# EAGLE board motherboard (EAGLE 8.5.0)
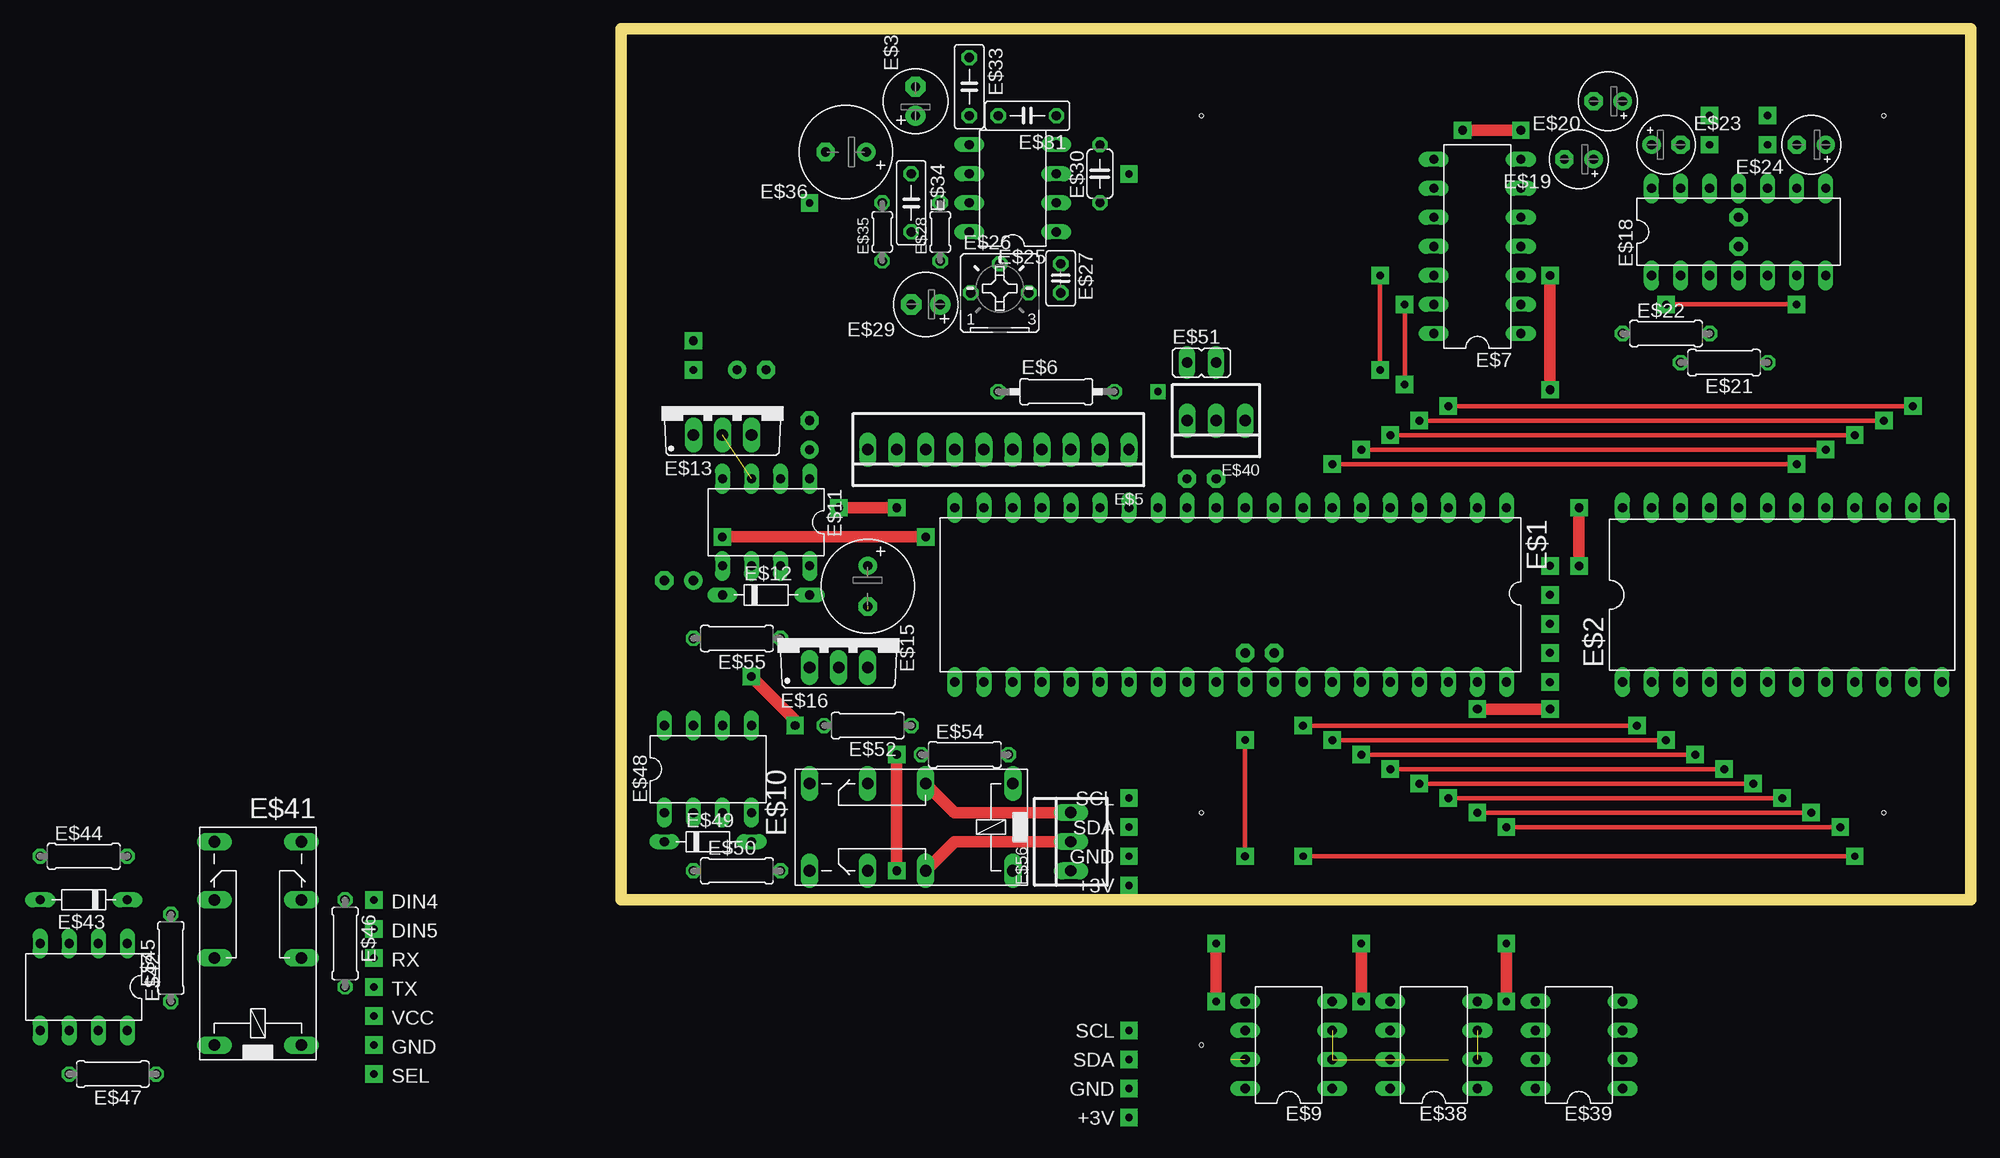
[diagram p0: board, top side]
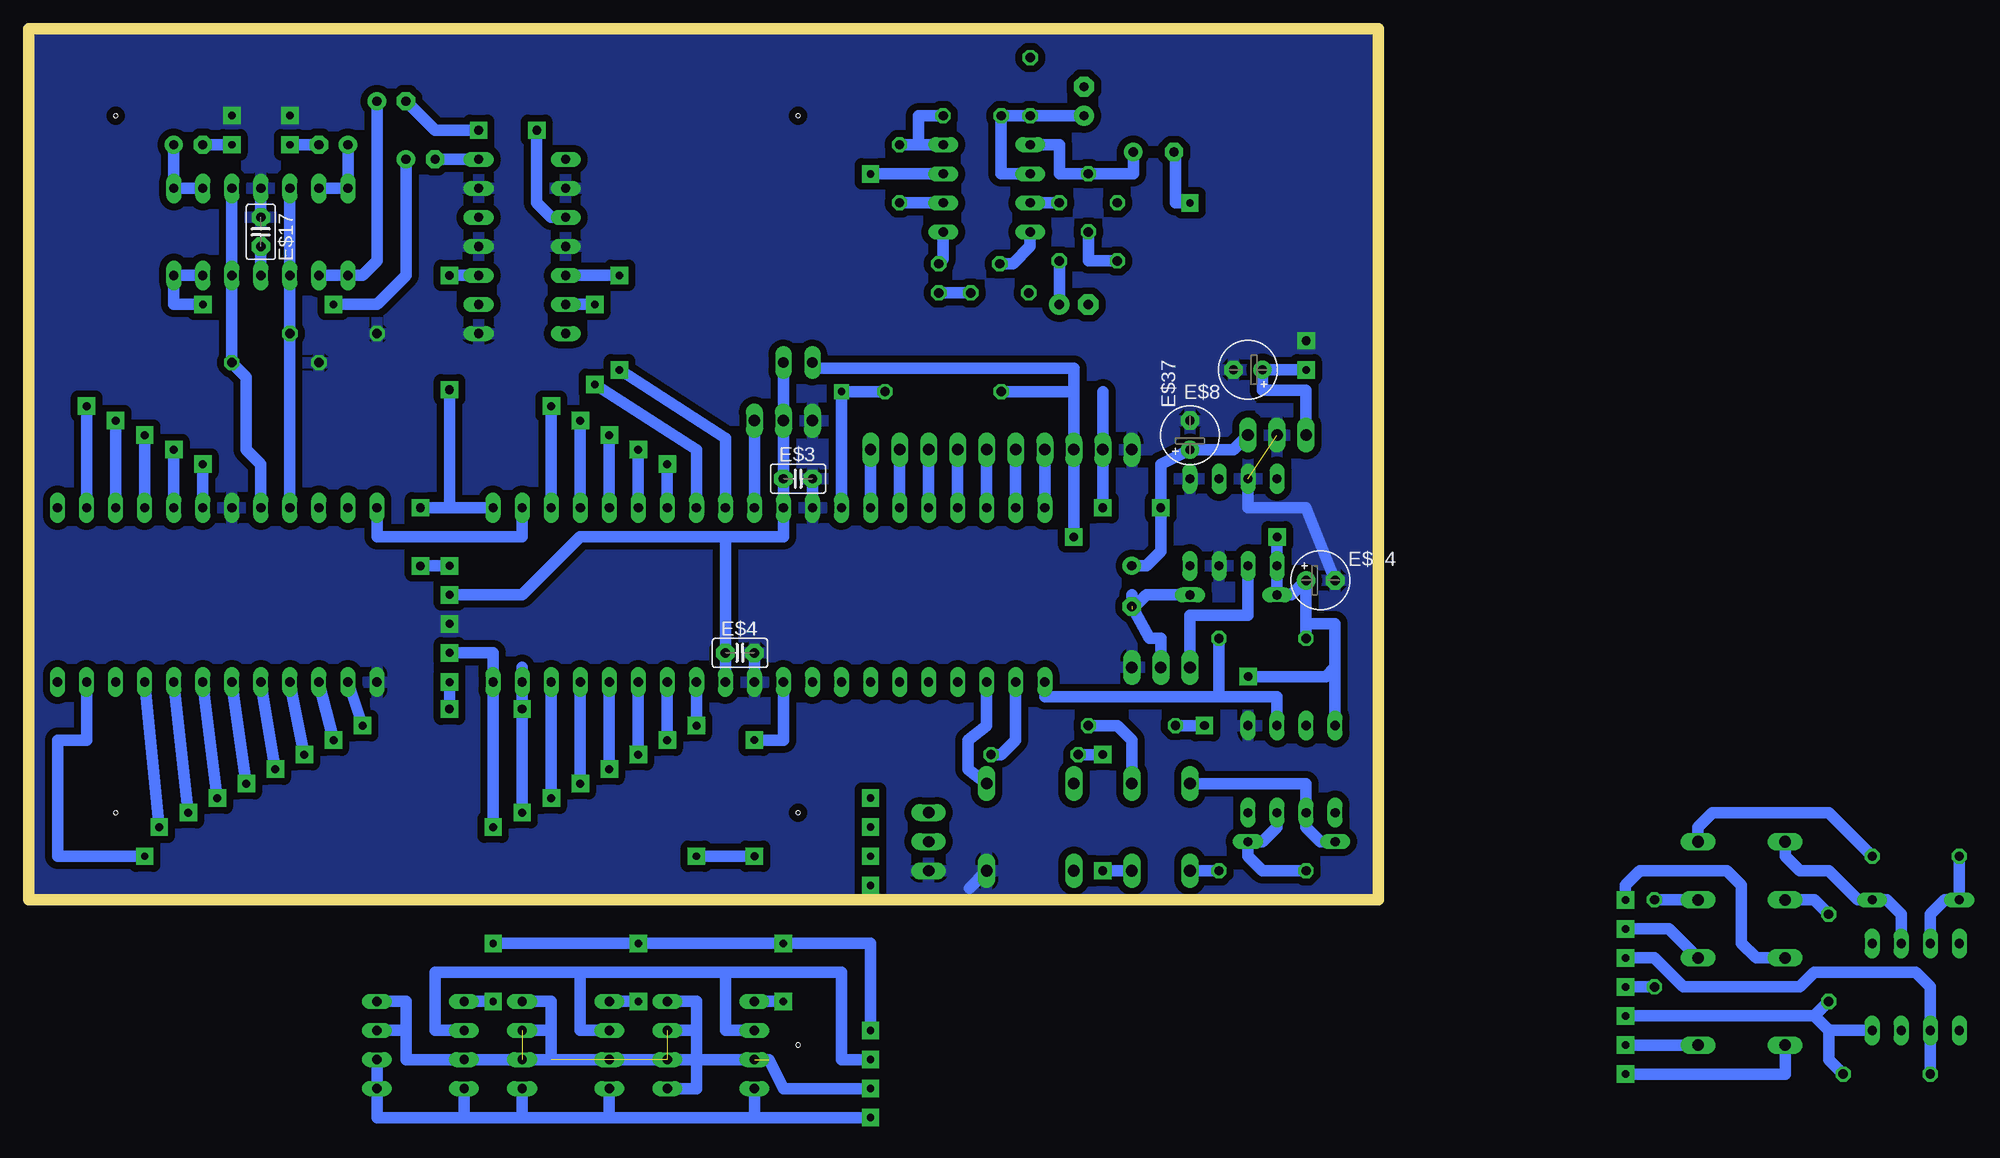
[diagram p1: board, bottom side, seen from below]

Size 118.11 x 76.2 mm. Coordinates in mm from the lower left corner, seen from the top.
Outline: 118.11,0 0,0 0,76.2 118.11,76.2 118.11,0
Copper layers (1*16): Top 0.035mm / dielectric 1.5mm / Bottom 0.035mm
Design rules "default *": minimum track width 6mil, minimum drill 0.35mm, track to track 6mil, track to pad 6mil, pad to pad 6mil, via to via 6mil, smd to smd 6mil, copper to edge 0mil, drill to drill 6mil, minimum pad ring 10mil, minimum via ring 8mil, stop-mask expansion 4mil, vias tented up to drill 0mil, thermal gap 10mil
Holes 0.35 mm at 110.49,7.62 50.8,7.62 110.49,68.58 50.8,68.58 50.8,-12.7

## Footprints (pad centres in the part's own frame; a part is rotated, then mirrored left to right if it is on the bottom)
DIL40 = drill 0.813 long: 1 -24.13,-7.62; 2 -21.59,-7.62; 3 -19.05,-7.62; 4 -16.51,-7.62; 5 -13.97,-7.62; 6 -11.43,-7.62; 7 -8.89,-7.62; 8 -6.35,-7.62; 9 -3.81,-7.62; 10 -1.27,-7.62; 11 1.27,-7.62; 12 3.81,-7.62; 13 6.35,-7.62; 14 8.89,-7.62; 15 11.43,-7.62; 16 13.97,-7.62; 17 16.51,-7.62; 18 19.05,-7.62; 19 21.59,-7.62; 20 24.13,-7.62; 21 24.13,7.62; 22 21.59,7.62; 23 19.05,7.62; 24 16.51,7.62; 25 13.97,7.62; 26 11.43,7.62; 27 8.89,7.62; 28 6.35,7.62; 29 3.81,7.62; 30 1.27,7.62; 31 -1.27,7.62; 32 -3.81,7.62; 33 -6.35,7.62; 34 -8.89,7.62; 35 -11.43,7.62; 36 -13.97,7.62; 37 -16.51,7.62; 38 -19.05,7.62; 39 -21.59,7.62; 40 -24.13,7.62
DIL24-6 = drill 0.813 long: 1 -13.97,-7.62; 2 -11.43,-7.62; 3 -8.89,-7.62; 4 -6.35,-7.62; 5 -3.81,-7.62; 6 -1.27,-7.62; 7 1.27,-7.62; 8 3.81,-7.62; 9 6.35,-7.62; 10 8.89,-7.62; 11 11.43,-7.62; 12 13.97,-7.62; 13 13.97,7.62; 14 11.43,7.62; 15 8.89,7.62; 16 6.35,7.62; 17 3.81,7.62; 18 1.27,7.62; 19 -1.27,7.62; 20 -3.81,7.62; 21 -6.35,7.62; 22 -8.89,7.62; 23 -11.43,7.62; 24 -13.97,7.62
C2.5-2 = drill 0.813 pad 1.6 octagon: 1 -1.27,0; 2 1.27,0
22-23-2101 = drill 1 long: 1 -11.43,0; 2 -8.89,0; 3 -6.35,0; 4 -3.81,0; 5 -1.27,0; 6 1.27,0; 7 3.81,0; 8 6.35,0; 9 8.89,0; 10 11.43,0
0207/10 = drill 0.813 octagon: 1 -5.08,0; 2 5.08,0
DIL14 = drill 0.813 long: 1 -7.62,-3.81; 2 -5.08,-3.81; 3 -2.54,-3.81; 4 0,-3.81; 5 2.54,-3.81; 6 5.08,-3.81; 7 7.62,-3.81; 8 7.62,3.81; 9 5.08,3.81; 10 2.54,3.81; 11 0,3.81; 12 -2.54,3.81; 13 -5.08,3.81; 14 -7.62,3.81
E2,5-5 = drill 0.813 pad 1.6: + -1.27,0 | drill 0.813 pad 1.6 octagon: - 1.27,0
DIL08 = drill 0.813 long: 1 -3.81,-3.81; 2 -1.27,-3.81; 3 1.27,-3.81; 4 3.81,-3.81; 5 3.81,3.81; 6 1.27,3.81; 7 -1.27,3.81; 8 -3.81,3.81
351 = drill 1.016 long: 1 -3.81,-3.81; 16 -3.81,3.81; O1 8.89,-3.81; O2 8.89,3.81; P1 3.81,-3.81; P2 3.81,3.81; S1 13.97,-3.81; S2 13.97,3.81
D-7.5 = drill 0.813 long: A 3.81,0; C -3.81,0
TO220V = drill 1.016 long: 1 -2.54,-2.54; 2 0,-2.54; 3 2.54,-2.54
E3,5-8 = drill 0.813 pad 1.6: + -1.778,0 | drill 0.813 pad 1.6 octagon: - 1.778,0
0207/7 = drill 0.813 octagon: 1 -3.81,0; 2 3.81,0
B25P = drill 0.813 octagon: A -2.54,0; E 2.54,0; S 0,2.54
C025-025X050 = drill 0.813 octagon: 1 -1.27,0; 2 1.27,0
0204/5 = drill 0.813 octagon: 1 -2.54,0; 2 2.54,0
E2,5-6 = drill 0.813 pad 1.778: + -1.27,0 | drill 0.813 pad 1.778 octagon: - 1.27,0
C050-024X044 = drill 0.813 octagon: 1 -2.54,0; 2 2.54,0
C050-025X075 = drill 0.813 octagon: 1 -2.54,0; 2 2.54,0
22-23-2031 = drill 1 long: 1 -2.54,0; 2 0,0; 3 2.54,0
JP1 = drill 0.914 long: 1 0,-1.27; 2 0,1.27

## Placement (x,y rotation side)
E$1  [DIL40]  53.34,26.67 180 top
E$2  [DIL24-6]  101.6,26.67 0 top
E$3  [C2.5-2]  50.8,36.83 0 bottom
E$4  [C2.5-2]  55.88,21.59 0 bottom
E$5  [22-23-2101]  33.02,39.37 180 top
E$6  [0207/10]  38.1,44.45 0 top
E$7  [DIL14]  74.93,57.15 90 top
E$8  [E2,5-5]  11.43,46.36 180 bottom
E$9  [DIL08]  58.42,-12.7 90 top  (outside the outline)
E$10  [351]  30.48,6.35 180 top
E$11  [DIL08]  12.7,33.02 180 top
E$12  [D-7.5]  12.7,26.67 0 top
E$13  [TO220V]  8.89,43.18 0 top
E$14  [E2,5-5]  5.08,27.94 0 bottom
E$15  [E3,5-8]  21.59,27.43 270 top
E$16  [TO220V]  19.05,22.86 0 top
E$17  [C2.5-2]  97.79,58.42 270 bottom
E$18  [DIL14]  97.79,58.42 0 top
E$19  [E2,5-5]  83.82,64.77 180 top
E$20  [E2,5-5]  86.36,69.85 180 top
E$21  [0207/7]  96.52,46.99 180 top
E$22  [0207/7]  91.44,49.53 0 top
E$23  [E2,5-5]  91.44,66.04 0 top
E$24  [E2,5-5]  104.14,66.04 180 top
E$25  [DIL08]  34.29,62.23 90 top
E$26  [B25P]  33.15,53.09 0 top
E$27  [C025-025X050]  38.48,54.36 270 top
E$28  [0204/5]  27.94,58.42 90 top
E$29  [E2,5-6]  26.67,52.07 180 top
E$30  [C050-024X044]  41.91,63.5 90 top
E$31  [C050-025X075]  35.56,68.58 180 top
E$32  [E2,5-6]  25.78,69.85 90 top
E$33  [C050-025X075]  30.48,71.12 270 top
E$34  [C050-025X075]  25.4,60.96 270 top
E$35  [0204/5]  22.86,58.42 90 top
E$36  [E3,5-8]  19.69,65.4 180 top
E$37  [E2,5-5]  16.51,40.64 90 bottom
E$38  [DIL08]  71.12,-12.7 90 top  (outside the outline)
E$39  [DIL08]  83.82,-12.7 90 top  (outside the outline)
E$40  [22-23-2031]  52.07,41.91 180 top
E$41  [351]  -31.75,-8.89 90 top  (outside the outline)
E$42  [DIL08]  -46.99,-7.62 180 top  (outside the outline)
E$43  [D-7.5]  -46.99,0 180 top  (outside the outline)
E$44  [0207/7]  -46.99,3.81 0 top  (outside the outline)
E$45  [0207/7]  -39.37,-5.08 90 top  (outside the outline)
E$46  [0207/7]  -24.13,-3.81 270 top  (outside the outline)
E$47  [0207/7]  -44.45,-15.24 180 top  (outside the outline)
E$48  [DIL08]  7.62,11.43 0 top
E$49  [D-7.5]  7.62,5.08 0 top
E$50  [0207/7]  10.16,2.54 0 top
E$51  [JP1]  50.8,46.99 270 top
E$52  [0207/7]  21.59,15.24 180 top
E$54  [0207/7]  30.1,12.7 0 top
E$55  [0207/7]  10.16,22.86 180 top
E$56  [22-23-2031]  39.37,5.08 90 top

## Library data of the parts
E$1 E$2 = ic-package
E$3 E$4 E$17 = capacitor-wima
E$5 E$40 E$56 = con-molex
E$6 E$21 E$22 E$27 E$28 E$30 E$31 E$33-E$35 E$44-E$47 E$50 E$52 E$54 E$55 = BeagleBone_Black_Wireless
E$7 E$9 E$11 E$18 E$25 E$38 E$39 = 40xx
E$8 E$14 E$15 E$19 E$20 E$23 E$24 E$29 E$32 E$36 E$37 = BeagleBone_Blue_R3
E$10 E$41 = relay
E$12 E$43 E$49 = diode
E$13 E$16 = transistor-pnp
E$26 = pot
E$42 E$48 = 74xx-eu
E$51 = jumper

## Nets
+3V: E$5.9 E$13.3 E$15.+ E$37.+
+5V: E$5.8 E$6.1 E$11.5 E$12.C E$14.+ E$48.8 E$51.1 E$52.2 E$55.2
+5V_JMP: E$1.11 E$1.32 E$3.1 E$40.2 E$51.2
GND [gnd]: E$1.12 E$1.31 E$2.1 E$2.19 E$3.2 E$4.2 E$5.10 E$7.1 E$7.4 E$7.6 E$7.9 E$7.11 E$8.- E$10.16 E$11.1 E$11.3 E$11.7 E$13.2 E$14.- E$16.3 E$17.1 E$18.11 E$21.2 E$22.1 E$37.- E$40.3 E$48.5 E$56.1
S$1: E$7.10 E$20.-
S$2: E$9.8 E$38.1 E$38.8 E$39.1 E$39.2 E$39.8
S$4: E$39.6
S$5: E$38.6
S$6: E$9.6
S$7: E$1.39 E$2.8
S$8: E$1.40 E$2.9
S$9: E$1.33 E$2.2
S$10: E$1.34 E$2.3
S$11: E$1.35 E$2.4
S$12: E$1.36 E$2.5
S$13: E$1.37 E$2.6
S$14: E$1.38 E$2.7
S$15: E$1.14 E$5.1
S$19: E$1.3 E$2.14
S$20: E$1.2 E$2.24
S$22: E$9.5 E$38.5 E$39.5
S$26: E$1.4 E$2.15
S$27: E$1.5 E$2.16
S$28: E$1.6 E$2.17
S$29: E$1.7 E$2.18
S$30: E$1.10 E$40.1
S$32: E$41.1
S$34: E$41.16
S$35: E$41.O2 E$45.2
S$36: E$1.15 E$5.2
S$37: E$1.16 E$5.3
S$38: E$1.17 E$5.4
S$39: E$1.18 E$5.5
S$40: E$1.19 E$5.6
S$41: E$1.20 E$5.7
S$42: E$1.13 E$6.2
S$43: E$1.21 E$48.6 E$55.1
S$44: E$42.8 E$45.1 E$47.1
S$45: E$41.O1 E$46.1
S$46: E$46.2
S$47: E$41.S2 E$42.2 E$43.C
S$49: E$48.3 E$49.A E$50.1
S$50: E$42.3 E$43.A E$44.1
S$52: E$10.S1 E$48.2 E$49.C
S$53: E$1.22 E$54.2
S$55: E$1.30 E$2.11
S$56: E$10.S2 E$50.2
S$57: E$41.S1 E$44.2
S$59: E$10.O2 E$54.1
S$60: E$41.P1
S$61: E$41.P2
S$63 [gnd]: E$12.A E$15.- E$16.2
S$64: E$42.6 E$47.2
S$65: E$1.23 E$10.1
S$66: E$10.P1 E$56.3
S$67: E$10.P2 E$56.2
S$68: E$9.1 E$9.2 E$9.3 E$9.4 E$9.7 E$38.2 E$38.3 E$38.4 E$38.7 E$39.3 E$39.4 E$39.7
S$69: E$10.O1 E$52.1
S$70: E$11.6 E$16.1
S$73: E$18.13 E$18.14 E$23.+
S$74: E$18.1 E$18.2 E$20.+
S$75: E$18.8 E$18.9 E$24.+
S$76: E$23.-
S$77: E$1.8 E$7.13
S$78: E$1.9 E$7.12
S$79: E$25.8 E$26.S
S$80: E$1.1 E$7.3
S$82: E$7.7 E$19.-
S$83: E$26.E E$27.2
S$84: E$2.21 E$18.3 E$18.12 E$22.2
S$85: E$2.20 E$18.5 E$18.10 E$21.1
S$87: E$17.2 E$18.4
S$89: E$18.6 E$18.7 E$19.+
S$90: E$24.-
S$93: E$25.7 E$28.2
S$94: E$28.1 E$29.+
S$96: E$25.4 E$30.2 E$31.1
S$97: E$25.2 E$30.1
S$98: E$25.3
S$99: E$25.5 E$34.1 E$36.+
S$100: E$25.1 E$27.1
S$101: E$25.6 E$31.2 E$32.+ E$33.2
S$102: E$34.2 E$35.1
S$104: E$8.+ E$13.1

## Tracks (layer width: path | path; a pad name or v marks a point on that pad's centre or on a via)
+3V  (via drill 0.75 pad 1.52)
  Top 1.016: v24.13,34.29 v19.05,34.29
  Bottom 1.016: E$13.3 12.7,39.37 E$37.+ 19.05,38.1 v19.05,34.29 19.05,30.48 20.32,29.21 E$15.+ | 24.13,44.45 E$5.9 v24.13,34.29
+5V  (via drill 0.75 pad 1.52)
  Top 1.016: v11.43,19.52 15.24,15.71 v15.24,15.24 | v8.89,31.75 v26.67,31.75
  Bottom 1.016: E$6.1 26.67,44.45 | 26.67,44.45 E$5.8 v26.67,31.75 | E$48.8 3.81,20.32 | 3.81,20.32 3.81,24.13 6.35,24.13 | 6.35,24.13 E$14.+ 7.62,26.67 E$12.C E$11.5 v8.89,31.75 | E$55.2 6.35,24.13 | 3.81,20.32 4.61,19.52 v11.43,19.52 | v15.24,15.24 E$52.2 | 26.67,44.45 26.67,46.48 49.53,46.48 E$51.1
+5V_JMP  (via drill 0.7 pad 1.52)
  Bottom 1.016: v81.28,26.67 74.93,26.67 69.85,31.75 57.15,31.75 | 57.15,31.75 52.07,31.75 E$1.11 E$3.1 E$40.2 E$51.2 | 57.15,31.75 E$1.32
GND  (via drill 0.65 pad 1.52, 0.7 pad 1.52, 0.75 pad 1.52)  (1 unrouted)
  Bottom 1.016: E$11.3 11.43,34.29 6.35,34.29 E$14.- | E$3.2 E$1.12 | E$1.31 E$4.2 | E$17.1 E$18.11 | E$10.16 35.81,1.02
  other vias: 6.35,48.9 81.28,24.13 95.25,68.58 100.33,68.58
  pour Bottom (isolate 0.61): 0,76.2 0,0 118.11,0 118.11,76.2
S$1  (via drill 0.75 pad 1.52)
  Top 1.016: v78.74,67.31 v73.66,67.31
  Bottom 1.016: E$20.- 82.55,67.31 v78.74,67.31 | v73.66,67.31 73.66,60.96 72.39,59.69 E$7.10
S$2  (via drill 0.65 pad 1.52)
  Bottom 1.016: v44.45,-19.05 54.61,-19.05 | 54.61,-19.05 E$9.8 | 54.61,-19.05 67.31,-19.05 | 67.31,-19.05 E$38.8 | 67.31,-19.05 74.93,-19.05 | 74.93,-19.05 80.01,-19.05 | 80.01,-19.05 E$39.8 | E$38.1 74.93,-19.05 | 80.01,-19.05 87.63,-19.05 E$39.1 E$39.2
S$3  (via drill 0.65 pad 1.52)
  other vias: 44.45,1.27
S$4  (via drill 0.65 pad 1.52)
  Bottom 1.016: E$39.6 82.55,-11.43 82.55,-6.35 46.99,-6.35 46.99,-13.97 v44.45,-13.97
S$5
  Bottom 1.016: E$38.6 69.85,-11.43 69.85,-6.35
S$6
  Bottom 1.016: E$9.6 57.15,-11.43 57.15,-6.35
S$7  (via drill 0.7 pad 1.52, 0.75 pad 1.52)
  Top 0.406: v74.93,7.62 v104.14,7.62
  Top 1.016: v81.28,16.67 v74.93,16.67
  Bottom 1.016: E$2.8 v104.14,7.62 | 74.93,20.32 E$1.39 v74.93,16.67 v74.93,7.62 | v81.28,19.05 v81.28,16.67
S$8  (via drill 0.7 pad 1.52)
  Top 0.406: v77.47,6.35 v106.68,6.35
  Bottom 1.016: v106.68,6.35 E$2.9 | v77.47,6.35 E$1.40 77.47,21.59 v81.28,21.59
S$9  (via drill 0.7 pad 1.52)
  Top 0.406: v59.69,15.24 v88.9,15.24
  Bottom 1.016: E$1.33 v59.69,15.24 | v88.9,15.24 E$2.2
S$10  (via drill 0.7 pad 1.52)
  Top 0.406: v62.23,13.97 v91.44,13.97
  Bottom 1.016: v62.23,13.97 E$1.34 | v91.44,13.97 E$2.3
S$11  (via drill 0.7 pad 1.52)
  Top 0.406: v64.77,12.7 v93.98,12.7
  Bottom 1.016: v64.77,12.7 E$1.35 | v93.98,12.7 E$2.4
S$12  (via drill 0.7 pad 1.52)
  Top 0.406: v67.31,11.43 v96.52,11.43
  Bottom 1.016: E$1.36 v67.31,11.43 | v96.52,11.43 E$2.5
S$13  (via drill 0.7 pad 1.52)
  Top 0.406: v69.85,10.16 v99.06,10.16
  Bottom 1.016: v69.85,10.16 E$1.37 | E$2.6 v99.06,10.16
S$14  (via drill 0.7 pad 1.52)
  Top 0.406: v72.39,8.89 v101.6,8.89
  Bottom 1.016: E$1.38 v72.39,8.89 | v101.6,8.89 E$2.7
S$15
  Bottom 1.016: E$1.14 E$5.1
S$16  (via drill 0.65 pad 1.52)
  other vias: 44.45,6.35
S$19  (via drill 0.7 pad 1.52)
  Top 0.406: v72.39,43.18 v113.03,43.18
  Bottom 1.016: E$1.3 v72.39,43.18 | E$2.14 v113.03,43.18
S$20
  Bottom 1.016: E$1.2 74.93,31.75 87.63,31.75 E$2.24
S$21  (via drill 0.65 pad 1.52)
  other vias: 44.45,8.89
S$22  (via drill 0.65 pad 1.52)
  Top 1.016: v52.07,-8.89 v52.07,-3.81 | v64.77,-8.89 v64.77,-3.81 | v77.47,-8.89 v77.47,-3.81
  Bottom 1.016: v44.45,-11.43 44.45,-3.81 v52.07,-3.81 v64.77,-3.81 v77.47,-3.81 | E$9.5 v52.07,-8.89 | E$38.5 v64.77,-8.89 | E$39.5 v77.47,-8.89
S$23  (via drill 0.65 pad 1.52)
  other vias: 44.45,3.81
S$26  (via drill 0.7 pad 1.52)
  Top 0.406: v69.85,41.91 v110.49,41.91
  Bottom 1.016: v69.85,41.91 E$1.4 | E$2.15 v110.49,41.91
S$27  (via drill 0.7 pad 1.52)
  Top 0.406: v67.31,40.64 v107.95,40.64
  Bottom 1.016: E$1.5 v67.31,40.64 | E$2.16 v107.95,40.64
S$28  (via drill 0.7 pad 1.52)
  Top 0.406: v64.77,39.37 v105.41,39.37
  Bottom 1.016: E$1.6 v64.77,39.37 | E$2.17 v105.41,39.37
S$29  (via drill 0.7 pad 1.52)
  Top 0.406: v62.23,38.1 v102.87,38.1
  Bottom 1.016: E$1.7 v62.23,38.1 | E$2.18 v102.87,38.1
S$30
  Bottom 1.016: E$1.10 E$40.1
S$32  (via drill 0.65 pad 1.52)
  Bottom 1.016: E$41.1 v-21.59,-12.7
S$34  (via drill 0.65 pad 1.52)
  Bottom 1.016: E$41.16 -35.56,-15.24 v-21.59,-15.24
S$35
  Bottom 1.016: E$45.2 -38.1,0 E$41.O2
S$36
  Bottom 1.016: E$1.15 E$5.2
S$37
  Bottom 1.016: E$1.16 E$5.3
S$38
  Bottom 1.016: E$1.17 E$5.4
S$39
  Bottom 1.016: E$1.18 E$5.5
S$40
  Bottom 1.016: E$1.19 E$5.6
S$41
  Bottom 1.016: E$1.20 E$5.7
S$42  (via drill 0.65 pad 1.3)
  Bottom 1.016: E$1.13 v46.99,44.45 E$6.2
S$43
  Bottom 1.016: E$48.6 8.89,17.78 13.97,17.78 | 13.97,17.78 29.21,17.78 E$1.21 | E$55.1 13.97,17.78
S$44  (via drill 0.65 pad 1.52)
  Bottom 1.016: E$45.1 -38.1,-10.16 | -38.1,-10.16 v-21.59,-10.16 | E$42.8 -39.37,-11.43 | -39.37,-11.43 -38.1,-10.16 | E$47.1 -39.37,-13.97 -39.37,-11.43
S$45
  Bottom 1.016: E$41.O1 E$46.1
S$46  (via drill 0.65 pad 1.52)
  Bottom 1.016: E$46.2 v-21.59,-7.62
S$47
  Bottom 1.016: E$42.2 -45.72,-1.27 -44.45,0 E$43.C -41.91,0 -39.37,2.54 -36.83,2.54 -35.56,3.81 E$41.S2
S$49
  Bottom 1.016: E$48.3 8.89,6.35 10.16,5.08 E$49.A 11.43,3.81 10.16,2.54 E$50.1
S$50
  Bottom 1.016: E$44.1 E$43.A -49.53,0 -48.26,-1.27 E$42.3
S$52
  Bottom 1.016: E$49.C 5.08,5.08 6.35,6.35 E$48.2 6.35,10.16 E$10.S1
S$53
  Bottom 1.016: E$1.22 31.75,13.97 33.02,12.7 E$54.2
S$55  (via drill 0.65 pad 1.52, 0.7 pad 1.52)
  Top 0.406: v54.61,3.81 v54.61,13.97 | v59.69,3.81 v107.95,3.81
  Bottom 1.016: v54.61,3.81 v59.69,3.81 | E$1.30 52.07,13.97 v54.61,13.97 | E$2.11 113.03,13.97 115.57,13.97 115.57,3.81 v107.95,3.81
S$56
  Bottom 1.016: E$50.2 E$10.S2
S$57
  Bottom 1.016: E$44.2 -39.37,7.62 -29.21,7.62 -27.94,6.35 E$41.S1
S$58  (via drill 0.65 pad 1.52)
  other vias: -21.59,-2.54
S$59  (via drill 0.75 pad 1.52)
  Top 1.016: v24.13,12.7 v24.13,2.54
  Bottom 1.016: E$10.O2 v24.13,2.54 | v24.13,12.7 E$54.1
S$60
  Bottom 1.016: E$41.P1 -25.4,-2.54 -21.59,-2.54
S$61  (via drill 0.65 pad 1.52)
  Bottom 1.016: E$41.P2 -33.02,-5.08 -31.75,-3.81 -31.75,1.27 -30.48,2.54 -22.86,2.54 -21.59,1.27 v-21.59,0
S$63  (1 unrouted)
  Bottom 1.016: 21.59,26.67 E$15.- 20.07,22.86 19.05,22.86 E$16.2 | E$12.A 20.32,26.67 21.59,25.4
S$64  (via drill 0.65 pad 1.52)
  Bottom 1.016: E$47.2 E$42.6 -48.26,-7.62 -46.99,-6.35 -38.1,-6.35 -36.83,-7.62 -26.67,-7.62 -24.13,-5.08 v-21.59,-5.08
S$65
  Bottom 1.016: E$1.23 34.29,15.24 35.94,13.97 35.94,11.43 E$10.1
S$66
  Top 1.016: E$10.P1 29.21,7.62 E$56.3
S$67
  Top 1.016: E$10.P2 29.21,5.08 E$56.2
S$68  (via drill 0.65 pad 1.52)  (5 unrouted)
  Bottom 1.016: v44.45,-16.51 52.07,-16.51 53.34,-13.97 72.39,-13.97 | 72.39,-13.97 E$39.7 85.09,-13.97 85.09,-11.43 | 72.39,-13.97 72.39,-11.43 | 72.39,-11.43 E$38.3 | 72.39,-11.43 72.39,-8.89 E$38.4 | 85.09,-11.43 E$39.3 | 85.09,-11.43 85.09,-8.89 E$39.4 | E$9.1 59.69,-16.51 59.69,-11.43 | 59.69,-11.43 E$9.3 | 59.69,-11.43 59.69,-8.89 E$9.4
S$69
  Bottom 1.016: E$10.O1 21.59,13.97 22.86,15.24 E$52.1
S$70
  Bottom 1.016: E$11.6 11.43,24.89 16.51,24.89 E$16.1
S$73
  Bottom 1.016: E$18.13 E$18.14 E$23.+
S$74
  Bottom 1.016: E$18.2 E$18.1 88.9,54.61 87.63,55.88 E$20.+
S$75
  Bottom 1.016: E$18.9 E$18.8 E$24.+
S$76  (via drill 0.65 pad 1.52)
  Bottom 1.016: E$23.- v95.25,66.04
S$77  (via drill 0.65 pad 1.52)
  Top 0.406: v68.58,52.07 v68.58,45.09
  Bottom 1.016: v68.58,52.07 E$7.13 | E$1.8 59.69,39.37 v68.58,45.09
S$78  (via drill 0.65 pad 1.52)
  Top 0.406: v66.42,54.61 v66.42,46.36
  Bottom 1.016: E$7.12 v66.42,54.61 | E$1.9 57.15,40.39 v66.42,46.36
S$79
  Bottom 1.016: E$25.8 30.48,57.15 32,55.63 E$26.S
S$80  (via drill 0.7 pad 1.52, 0.75 pad 1.52)
  Top 1.016: v83.82,34.29 v83.82,29.21 | v81.28,54.61 v81.28,44.61
  Bottom 1.016: E$1.1 81.28,34.29 | 81.28,34.29 v83.82,34.29 | v83.82,29.21 v81.28,29.21 | E$7.3 v81.28,54.61 | v81.28,44.61 81.28,34.29
S$82
  Bottom 1.016: E$19.- E$7.7
S$83
  Bottom 1.016: E$26.E E$27.2
S$84
  Bottom 1.016: E$18.12 E$18.3 E$22.2 E$2.21
S$85
  Bottom 1.016: E$18.10 E$18.5 E$21.1 99.06,45.72 99.06,39.37 97.79,38.1 E$2.20
S$87
  Bottom 1.016: E$17.2 E$18.4
S$89  (via drill 0.65 pad 1.52)
  Top 0.406: v102.87,52.07 v91.44,52.07
  Bottom 1.016: E$18.6 E$18.7 105.41,52.07 v102.87,52.07 | v91.44,52.07 87.63,52.07 85.09,54.61 E$19.+
S$90  (via drill 0.65 pad 1.52)
  Bottom 1.016: v100.33,66.04 E$24.-
S$93
  Bottom 1.016: E$28.2 E$25.7
S$94
  Bottom 1.016: E$29.+ E$28.1
S$96
  Bottom 1.016: E$25.4 40.26,66.04 | 40.26,66.04 E$30.2 | E$31.1 40.26,68.58 40.26,66.04
S$97
  Bottom 1.016: E$25.2 E$30.1
S$98  (via drill 0.65 pad 1.52)
  Bottom 1.016: E$25.3 v44.45,63.5
S$99
  Bottom 1.016: E$25.5 27.94,66.04 27.94,63.5 E$34.1 21.46,63.5 E$36.+
S$100
  Bottom 1.016: E$25.1 38.1,56.01 E$27.1
S$101
  Bottom 1.016: E$32.+ E$33.2 E$31.2 33.02,63.5 E$25.6
S$102
  Bottom 1.016: E$35.1 25.4,55.88 E$34.2
S$103  (via drill 0.65 pad 1.52)
  Bottom 1.016: 17.78,64.77 17.78,60.96 v16.51,60.96
S$104  (via drill 0.65 pad 1.52)
  Bottom 1.016: v6.35,46.36 E$8.+ 10.16,44.58 6.35,44.58 E$13.1

## Text on the board
tPlace: SCL | SDA | GND | +3V | DIN4 | DIN5 | RX | TX | VCC | SCL | GND | SDA | SEL | GND | +3V